# Altium PCB SOM_Codec_WM8731.PcbDoc (part 1 of 2)
Units mm, origin at the board's own origin, x right, y up, seen from the top; angles counter-clockwise.
Board outline 137 x 91.68 mm, 4 copper layers (Top Layer, Mid-Layer 1, Mid-Layer 3, Bottom Layer); 135 components, 119 nets, 648 pads, 240 vias.
Unrouted connection lines stored in the file: 116.
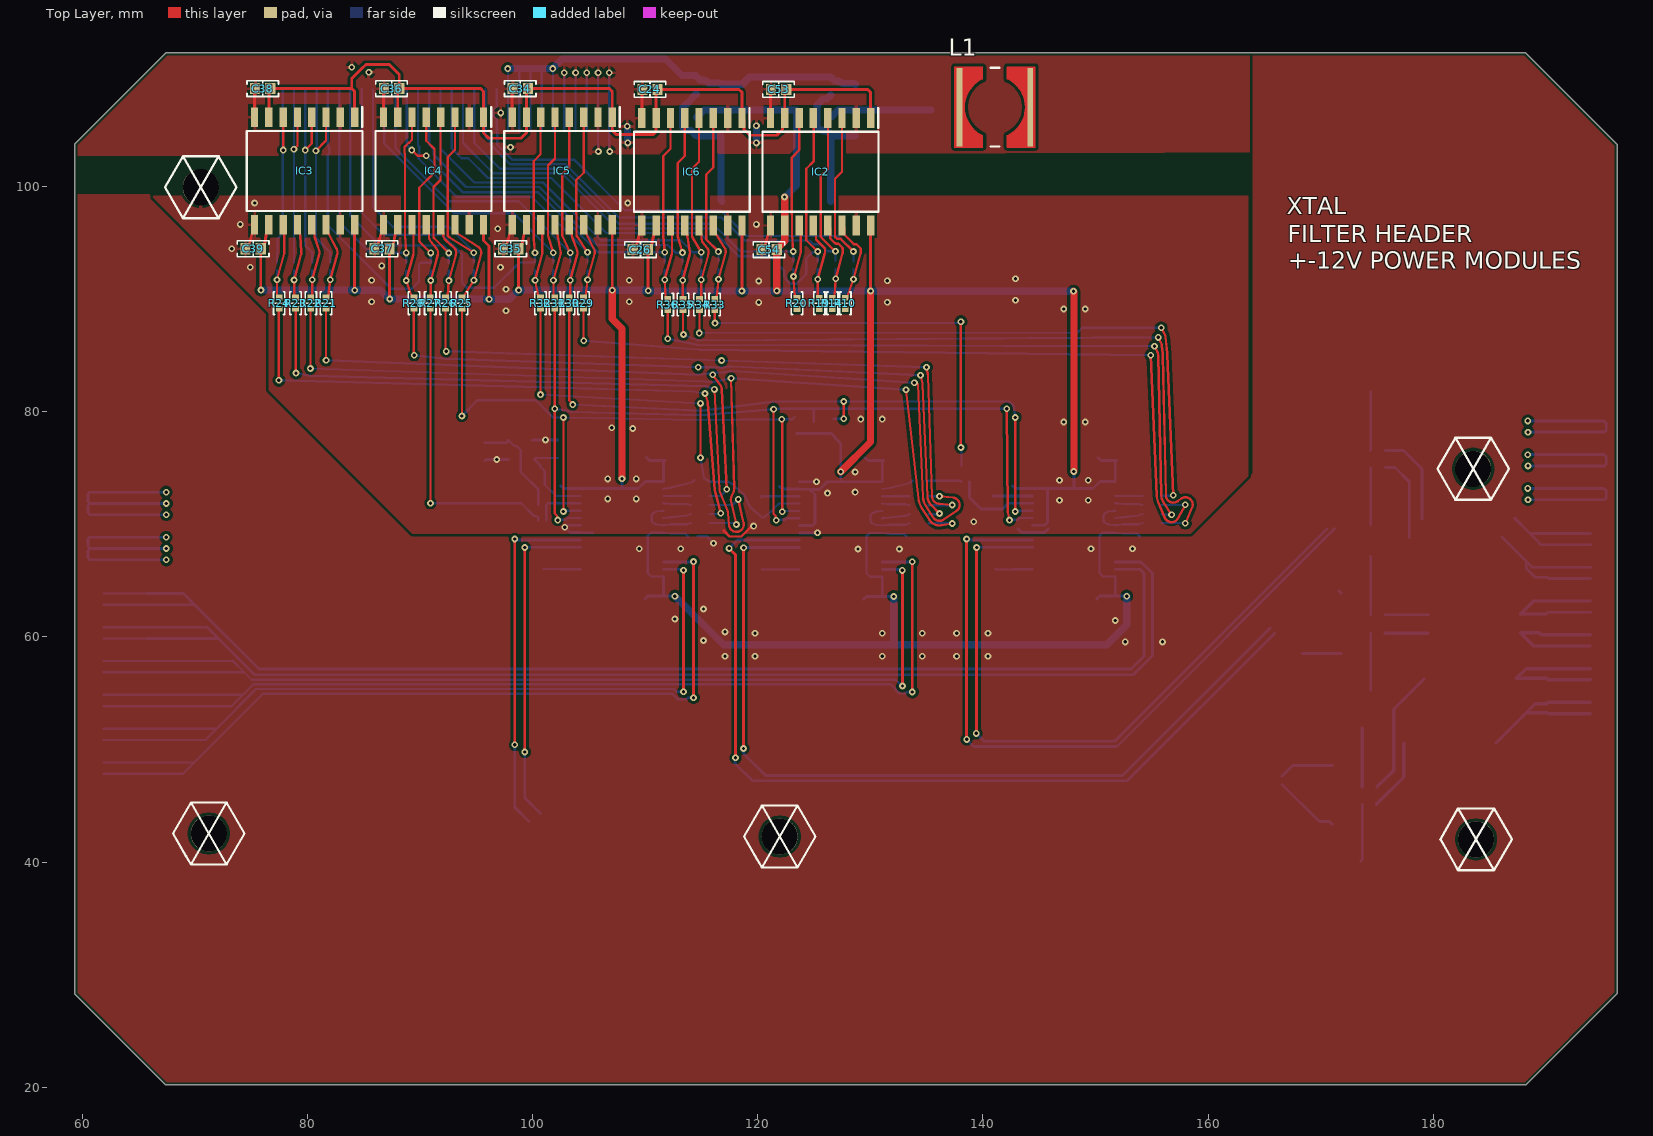
[diagram p0: Top Layer view]
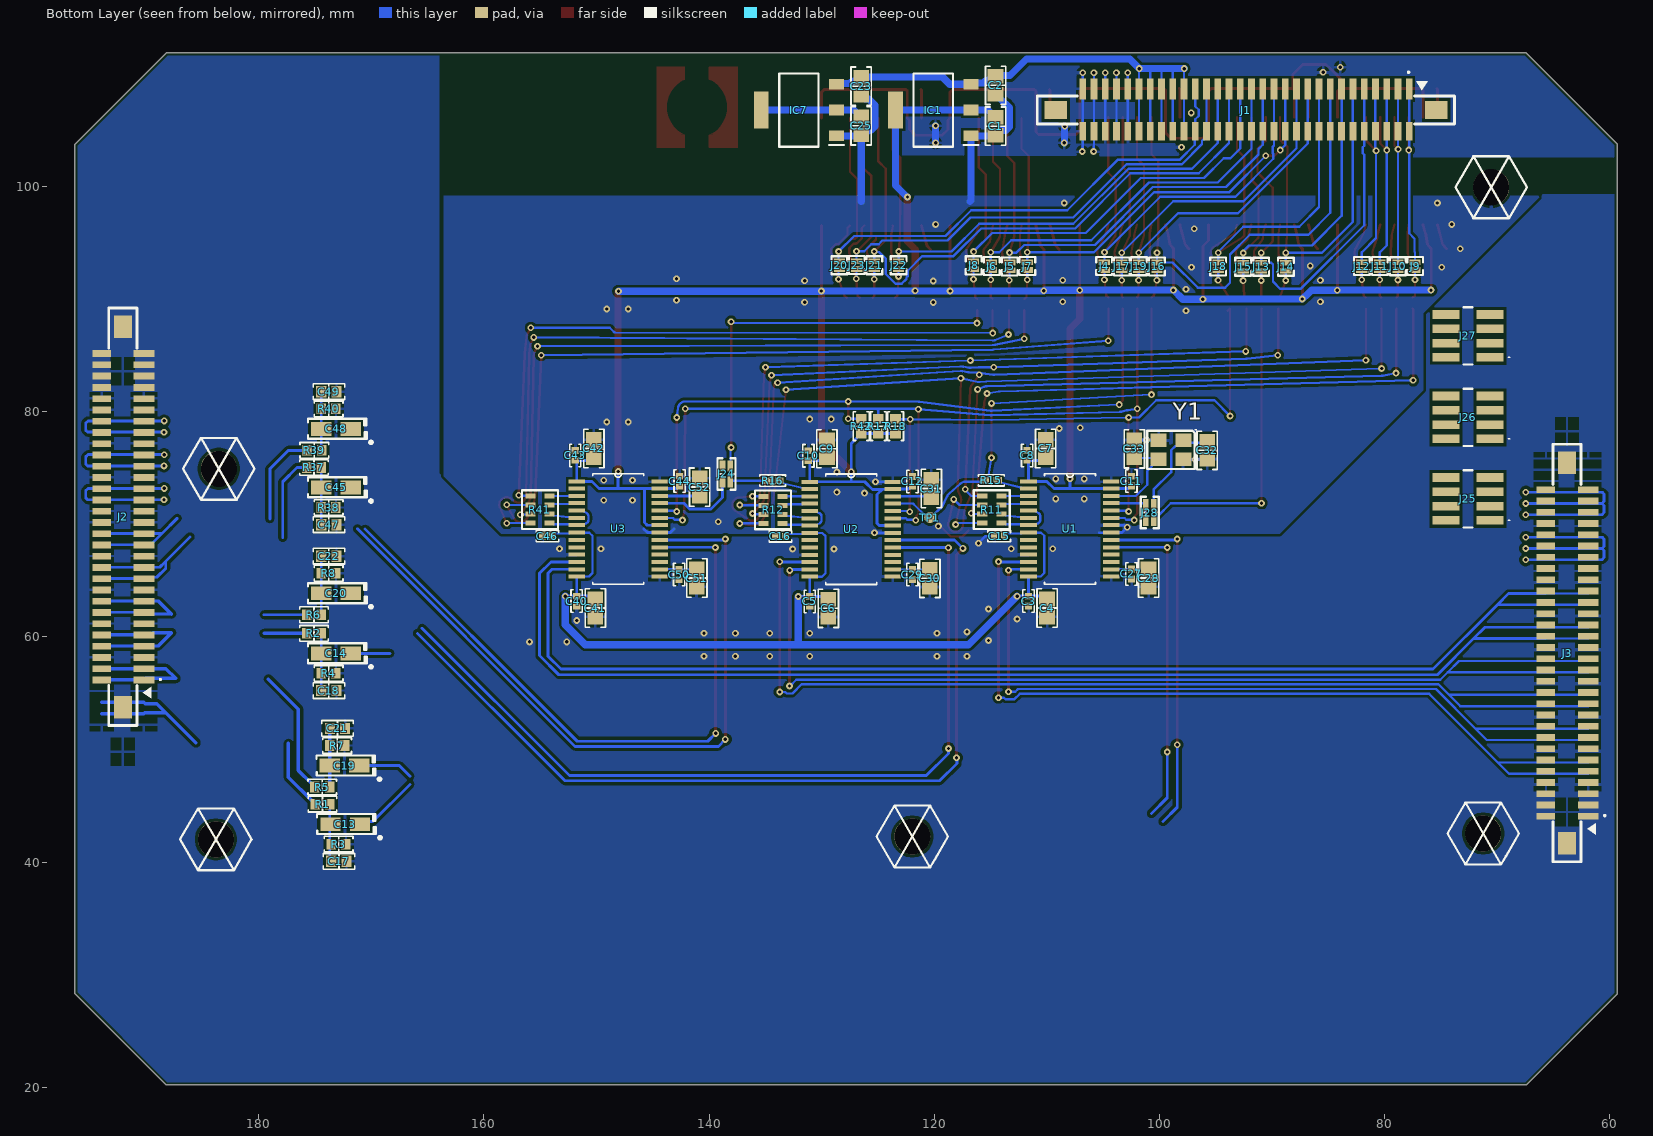
[diagram p1: Bottom Layer view, seen from below]

## Layer stack, top to bottom
Top Solder: solder mask 0.0102, Solder Resist, Dk 3.5
Top Layer: signal copper 0.0356
Dielectric 1: dielectric 0.32, FR-4, Dk 4.8
Mid-Layer 1: signal copper 0.0356
Dielectric2: dielectric 0.32, FR-4, Dk 4.8
Mid-Layer 3: signal copper 0.0356
Dielectric3: dielectric 0.32, FR-4, Dk 4.8
Bottom Layer: signal copper 0.0356
Bottom Solder: solder mask 0.0102, Solder Resist, Dk 3.5

## Board outline
59.346,28.284 67.423,20.207 188.228,20.207 196.342,28.321 196.342,103.505 196.342,103.759 188.214,111.887 67.437,111.887 59.346,103.796

## Design rules (kind name [scope] priority, off if disabled: settings)
BoardOutlineClearance [All] p1: gap=0.254 ignorepadtopadclearanceinfootprint=FALSE except(0: Arc-SplitContinuation Track-SplitContinuation SMDPad-SplitContinuation THPad-SplitContinuation Via-SplitContinuation Fill-SplitContinuation Poly-SplitContinuation Region-SplitContinuation Text-SplitContinuation)
Clearance [All] p1: gap=0.254 ignorepadtopadclearanceinfootprint=TRUE except(0.203: Arc-Arc Arc-Track Arc-SMDPad Track-Track Track-SMDPad)
HoleSize [All] p1: absolutevalues=TRUE maxlimit=4 minlimit=0.025 maxpercent=80.000 minpercent=20.000
MinimumSolderMaskSliver [All] p1: minsoldermaskwidth=0.102
PolygonConnect PolygonConnect_11 [All vs InNet('+5V')] p1: thpad.connectstyle=Relief thpad.reliefconductorwidth=0.254 thpad.reliefentries=4 thpad.polygonreliefangle="90 Angle" thpad.airgapwidth=0.254 smdpad.connectstyle=Relief smdpad.reliefconductorwidth=0.254 smdpad.reliefentries=4 smdpad.polygonreliefangle="90 Angle" smdpad.airgapwidth=0.254 via.connectstyle=Direct via.reliefconductorwidth=0.254 via.reliefentries=4 via.polygonreliefangle="90 Angle" via.airgapwidth=0.254
PolygonConnect PolygonConnect_10 [All vs InNet('+3V3_CODEC')] p2: thpad.connectstyle=Relief thpad.reliefconductorwidth=0.254 thpad.reliefentries=4 thpad.polygonreliefangle="90 Angle" thpad.airgapwidth=0.254 smdpad.connectstyle=Relief smdpad.reliefconductorwidth=0.254 smdpad.reliefentries=4 smdpad.polygonreliefangle="90 Angle" smdpad.airgapwidth=0.254 via.connectstyle=Direct via.reliefconductorwidth=0.254 via.reliefentries=4 via.polygonreliefangle="90 Angle" via.airgapwidth=0.254
PolygonConnect PolygonConnect_9 [All vs InNet('GND_A')] p3: thpad.connectstyle=Relief thpad.reliefconductorwidth=0.254 thpad.reliefentries=4 thpad.polygonreliefangle="90 Angle" thpad.airgapwidth=0.254 smdpad.connectstyle=Relief smdpad.reliefconductorwidth=0.254 smdpad.reliefentries=4 smdpad.polygonreliefangle="90 Angle" smdpad.airgapwidth=0.254 via.connectstyle=Direct via.reliefconductorwidth=0.254 via.reliefentries=4 via.polygonreliefangle="90 Angle" via.airgapwidth=0.254
PolygonConnect PolygonConnect_8 [All vs InNet('GND')] p4: thpad.connectstyle=Relief thpad.reliefconductorwidth=0.254 thpad.reliefentries=4 thpad.polygonreliefangle="90 Angle" thpad.airgapwidth=0.254 smdpad.connectstyle=Relief smdpad.reliefconductorwidth=0.254 smdpad.reliefentries=4 smdpad.polygonreliefangle="90 Angle" smdpad.airgapwidth=0.254 via.connectstyle=Direct via.reliefconductorwidth=0.254 via.reliefentries=4 via.polygonreliefangle="90 Angle" via.airgapwidth=0.254
PolygonConnect PolygonConnect_7 [All vs InNet('+MCU')] p5: thpad.connectstyle=Relief thpad.reliefconductorwidth=0.254 thpad.reliefentries=4 thpad.polygonreliefangle="90 Angle" thpad.airgapwidth=0.254 smdpad.connectstyle=Relief smdpad.reliefconductorwidth=0.254 smdpad.reliefentries=4 smdpad.polygonreliefangle="90 Angle" smdpad.airgapwidth=0.254 via.connectstyle=Direct via.reliefconductorwidth=0.254 via.reliefentries=4 via.polygonreliefangle="90 Angle" via.airgapwidth=0.254
PolygonConnect PolygonConnect_6 [All vs InNet('+5V')] p6: thpad.connectstyle=Relief thpad.reliefconductorwidth=0.254 thpad.reliefentries=4 thpad.polygonreliefangle="90 Angle" thpad.airgapwidth=0.254 smdpad.connectstyle=Relief smdpad.reliefconductorwidth=0.254 smdpad.reliefentries=4 smdpad.polygonreliefangle="90 Angle" smdpad.airgapwidth=0.254 via.connectstyle=Direct via.reliefconductorwidth=0.254 via.reliefentries=4 via.polygonreliefangle="90 Angle" via.airgapwidth=0.254
PolygonConnect PolygonConnect_5 [All vs IsNamedPolygon('+5V_L01_P002')] p7: thpad.connectstyle=Relief thpad.reliefconductorwidth=0.254 thpad.reliefentries=4 thpad.polygonreliefangle="90 Angle" thpad.airgapwidth=0.254 smdpad.connectstyle=Direct smdpad.reliefconductorwidth=0.254 smdpad.reliefentries=4 smdpad.polygonreliefangle="90 Angle" smdpad.airgapwidth=0.254 via.connectstyle=Direct via.reliefconductorwidth=0.254 via.reliefentries=4 via.polygonreliefangle="90 Angle" via.airgapwidth=0.254
PolygonConnect PolygonConnect_4 [All vs IsNamedPolygon('V_USB_L01_P001')] p8: thpad.connectstyle=Relief thpad.reliefconductorwidth=0.254 thpad.reliefentries=4 thpad.polygonreliefangle="90 Angle" thpad.airgapwidth=0.254 smdpad.connectstyle=Direct smdpad.reliefconductorwidth=0.254 smdpad.reliefentries=4 smdpad.polygonreliefangle="90 Angle" smdpad.airgapwidth=0.254 via.connectstyle=Direct via.reliefconductorwidth=0.254 via.reliefentries=4 via.polygonreliefangle="90 Angle" via.airgapwidth=0.254
PolygonConnect PolygonConnect_3 [All vs IsNamedPolygon('+3V3_D')] p9: thpad.connectstyle=Relief thpad.reliefconductorwidth=0.254 thpad.reliefentries=4 thpad.polygonreliefangle="90 Angle" thpad.airgapwidth=0.254 smdpad.connectstyle=Direct smdpad.reliefconductorwidth=0.254 smdpad.reliefentries=4 smdpad.polygonreliefangle="90 Angle" smdpad.airgapwidth=0.254 via.connectstyle=Direct via.reliefconductorwidth=0.254 via.reliefentries=4 via.polygonreliefangle="90 Angle" via.airgapwidth=0.254
PolygonConnect PolygonConnect_2 [All vs IsNamedPolygon('+5V_Out')] p10: thpad.connectstyle=Relief thpad.reliefconductorwidth=0.254 thpad.reliefentries=4 thpad.polygonreliefangle="90 Angle" thpad.airgapwidth=0.254 smdpad.connectstyle=Direct smdpad.reliefconductorwidth=0.254 smdpad.reliefentries=4 smdpad.polygonreliefangle="90 Angle" smdpad.airgapwidth=0.254 via.connectstyle=Direct via.reliefconductorwidth=0.254 via.reliefentries=4 via.polygonreliefangle="90 Angle" via.airgapwidth=0.254
PolygonConnect PolygonConnect_1 [All vs IsNamedPolygon('GND_MCU')] p11: thpad.connectstyle=Relief thpad.reliefconductorwidth=0.254 thpad.reliefentries=4 thpad.polygonreliefangle="90 Angle" thpad.airgapwidth=0.254 smdpad.connectstyle=Direct smdpad.reliefconductorwidth=0.254 smdpad.reliefentries=4 smdpad.polygonreliefangle="90 Angle" smdpad.airgapwidth=0.254 via.connectstyle=Direct via.reliefconductorwidth=0.254 via.reliefentries=4 via.polygonreliefangle="90 Angle" via.airgapwidth=0.254
PolygonConnect [All] p12: connectstyle=Relief reliefconductorwidth=0.254 reliefentries=4 polygonreliefangle="90 Angle" airgapwidth=0.254
RoomDefinition SOM_Codec_WM8731 [InComponentClass('SOM_Codec_WM8731')] p1: confinementstyle=ConfineIn formatcopy=TRUE lockcomponents=FALSE outline 0,0 50.8,0 50.8,25.4 0,25.4
RoutingVias [All] p1: holewidth=0.3 width=0.6 viastyle="Through Hole" minholewidth=0.3 minwidth=0.6 maxholewidth=0.3 maxwidth=0.6
SolderMaskExpansion [All] p1: expansion=0.051 istentingtop=FALSE
Width [All] p1: maxlimit=1.27 minlimit=0.203 preferedwidth=0.203
28 further rules are at their usual default settings.

## Classes and differential pairs
net class PowerNet: NetC25_2

## Components (designator, comment, footprint, x,y, rotation, side; value= is the part's Value field where it differs from the comment)
C1 "=VALUE" "CAP 0805_2012" 114.554,105.372 r90 bottom
C2 "=VALUE" "CAP 0805_2012" 114.554,109.004 r90 bottom
C3 "=VALUE" "CAP 0402_1005" 111.633,63.187 r90 bottom
C4 "=VALUE" "CAP 0805_2012" 109.982,62.573 r90 bottom
C5 "=VALUE" "CAP 0402_1005" 131.064,63.162 r90 bottom
C6 "=VALUE" "CAP 0805_2012" 129.413,62.548 r90 bottom
C7 "=VALUE" "CAP 0805_2012" 110.109,76.746 r270 bottom
C8 "=VALUE" "CAP 0402_1005" 111.76,76.132 r270 bottom
C9 "=VALUE" "CAP 0805_2012" 129.54,76.721 r270 bottom
C10 "=VALUE" "CAP 0402_1005" 131.191,76.107 r270 bottom
C11 "=VALUE" "CAP 0402_1005" 102.489,73.846 r90 bottom
C12 "=VALUE" "CAP 0402_1005" 121.94,73.821 r90 bottom
C13 "10 µF" "CAP POL 1206_3216" 172.332,43.373 r0 bottom
C14 "10 µF" "CAP POL 1206_3216" 173.141,58.547 r0 bottom
C15 "=VALUE" "CAP 0402_1005" 114.232,68.961 r180 bottom
C16 "=VALUE" "CAP 0402_1005" 133.663,68.936 r180 bottom
C17 "=VALUE" "CAP 0603_1608" 172.887,40.071 r0 bottom
C18 "=VALUE" "CAP 0603_1608" 173.776,55.245 r0 bottom
C19 "10 µF" "CAP POL 1206_3216" 172.379,48.58 r0 bottom
C20 "10 µF" "CAP POL 1206_3216" 173.141,63.881 r0 bottom
C21 "=VALUE" "CAP 0603_1608" 173.014,51.882 r0 bottom
C22 "=VALUE" "CAP 0603_1608" 173.776,67.183 r0 bottom
C23 "=VALUE" "CAP 0805_2012" 126.492,108.928 r90 bottom
C24 "=VALUE" "CAP 0603_1608" 110.431,108.641 r0 top
C25 "=VALUE" "CAP 0805_2012" 126.492,105.41 r90 bottom
C26 "=VALUE" "CAP 0603_1608" 109.582,94.417 r0 top
C27 "=VALUE" "CAP 0402_1005" 102.489,65.6 r270 bottom
C28 "=VALUE" "CAP 0805_2012" 100.965,65.24 r270 bottom
C29 "=VALUE" "CAP 0402_1005" 121.945,65.549 r270 bottom
C30 "=VALUE" "CAP 0805_2012" 120.396,65.215 r270 bottom
C31 "=VALUE" "CAP 0805_2012" 120.269,73.19 r90 bottom
C32 "=VALUE" "CAP 0805_2012" 95.758,76.581 r270 bottom
C33 "=VALUE" "CAP 0805_2012" 102.235,76.708 r90 bottom
C34 "=VALUE" "CAP 0603_1608" 98.913,108.712 r0 top
C35 "=VALUE" "CAP 0603_1608" 98.064,94.488 r0 top
C36 "=VALUE" "CAP 0603_1608" 87.483,108.712 r0 top
C37 "=VALUE" "CAP 0603_1608" 86.634,94.488 r0 top
C38 "=VALUE" "CAP 0603_1608" 76.033,108.712 r0 top
C39 "=VALUE" "CAP 0603_1608" 75.184,94.488 r0 top
C40 "=VALUE" "CAP 0402_1005" 151.765,63.187 r90 bottom
C41 "=VALUE" "CAP 0805_2012" 150.114,62.573 r90 bottom
C42 "=VALUE" "CAP 0805_2012" 150.241,76.746 r270 bottom
C43 "=VALUE" "CAP 0402_1005" 151.892,76.132 r270 bottom
C44 "=VALUE" "CAP 0402_1005" 142.621,73.846 r90 bottom
C45 "10 µF" "CAP POL 1206_3216" 173.141,73.279 r0 bottom
C46 "=VALUE" "CAP 0402_1005" 154.364,68.961 r180 bottom
C47 "=VALUE" "CAP 0603_1608" 173.776,69.977 r0 bottom
C48 "10 µF" "CAP POL 1206_3216" 173.141,78.486 r0 bottom
C49 "=VALUE" "CAP 0603_1608" 173.776,81.788 r0 bottom
C50 "=VALUE" "CAP 0402_1005" 142.672,65.549 r270 bottom
C51 "=VALUE" "CAP 0805_2012" 141.097,65.24 r270 bottom
C52 "=VALUE" "CAP 0805_2012" 140.843,73.317 r90 bottom
C53 "=VALUE" "CAP 0603_1608" 121.861,108.641 r0 top
C54 "=VALUE" "CAP 0603_1608" 121.012,94.417 r0 top
IC1 "ams1117-3.3v" SOT-223 120.094,106.807 r0 bottom
IC2 "ISO7241CDWR" SOIC127P1030X265-16N 125.584,101.326 r270 top
IC3 "ISO7241CDWR" SOIC127P1030X265-16N 79.756,101.397 r270 top
IC4 "ISO7241CDWR" SOIC127P1030X265-16N 91.206,101.397 r270 top
IC5 "ISO7241CDWR" SOIC127P1030X265-16N 102.636,101.397 r270 top
IC6 "ISO7241CDWR" SOIC127P1030X265-16N 114.154,101.326 r270 top
IC7 "ams1117-3.3v" SOT-223 132.032,106.807 r0 bottom
J1 "3-1734248-0" 317342480 92.32,107.157 r180 bottom
J2 "3-1734248-0" 317342480 191.735,70.672 r270 bottom
J3 "3-1734248-0" 317342480 63.445,58.575 r270 bottom
J4 "" "CON: JUMPER x1" 104.909,93.297 r270 bottom
J5 "" "CON: JUMPER x1" 113.304,93.267 r270 bottom
J6 "" "CON: JUMPER x1" 114.916,93.297 r270 bottom
J7 "" "CON: JUMPER x1" 111.741,93.297 r270 bottom
J8 "" "CON: JUMPER x1" 116.516,93.359 r270 bottom
J9 "" "CON: JUMPER x1" 77.299,93.297 r270 bottom
J10 "" "CON: JUMPER x1" 78.818,93.283 r270 bottom
J11 "" "CON: JUMPER x1" 80.423,93.297 r270 bottom
J12 "" "CON: JUMPER x1" 82.023,93.297 r270 bottom
J13 "" "CON: JUMPER x1" 90.962,93.245 r270 bottom
J14 "" "CON: JUMPER x1" 88.778,93.245 r270 bottom
J15 "" "CON: JUMPER x1" 92.564,93.235 r270 bottom
J16 "" "CON: JUMPER x1" 100.223,93.264 r270 bottom
J17 "" "CON: JUMPER x1" 103.347,93.264 r270 bottom
J18 "" "CON: JUMPER x1" 94.787,93.264 r270 bottom
J19 "" "CON: JUMPER x1" 101.839,93.281 r270 bottom
J20 "" "CON: JUMPER x1" 128.429,93.362 r270 bottom
J21 "" "CON: JUMPER x1" 125.33,93.362 r270 bottom
J22 "" "CON: JUMPER x1" 123.171,93.362 r270 bottom
J23 "" "CON: JUMPER x1" 126.893,93.391 r270 bottom
J24 "" "CON: JUMPER x2"#1 138.461,73.787 r180 bottom
J25 "20021121-00008T4LF" 2002112100008T4LF 72.599,72.263 r90 bottom
J26 "20021121-00008T4LF" 2002112100008T4LF 72.599,79.502 r90 bottom
J27 "20021121-00008T4LF" 2002112100008T4LF 72.599,86.741 r90 bottom
J28 "" "CON: JUMPER x2"#2 100.869,71.755 r180 bottom
L1 "" "BOURNS SRR6028" 141.072,107.061 r180 top value="3.3 µH"
R1 "5.6 kOhms" "RES 0603_1608" 174.339,45.151 r180 bottom
R2 "5.6 kOhms" "RES 0603_1608" 175.101,60.325 r180 bottom
R3 "5.6 kOhms" "RES 0603_1608" 172.912,41.595 r0 bottom
R4 "5.6 kOhms" "RES 0603_1608" 173.801,56.769 r0 bottom
R5 "5.6 kOhms" "RES 0603_1608" 174.369,46.675 r180 bottom
R6 "5.6 kOhms" "RES 0603_1608" 175.101,61.976 r180 bottom
R7 "5.6 kOhms" "RES 0603_1608" 173.039,50.358 r0 bottom
R8 "5.6 kOhms" "RES 0603_1608" 173.801,65.659 r0 bottom
R10 "22 Ohms" "YAGEO RES 0402_1005" 127.786,89.639 r270 top
R11 "CAY16-33R0F4LF" "RESNET 1206-8 CONVEX" 114.896,71.317 r180 bottom
R12 "CAY16-33R0F4LF" "RESNET 1206-8 CONVEX" 134.327,71.292 r0 bottom
R14 "22 Ohms" "YAGEO RES 0402_1005" 126.631,89.639 r270 top
R15 "100 Ohms" "RES 0402_1005" 114.935,73.914 r0 bottom
R16 "100 Ohms" "RES 0402_1005" 134.366,73.889 r0 bottom
R17 "5.6 kOhms" "RES 0603_1608" 124.968,78.725 r90 bottom
R18 "5.6 kOhms" "RES 0603_1608" 123.444,78.725 r90 bottom
R19 "22 Ohms" "YAGEO RES 0402_1005" 125.476,89.639 r270 top
R20 "22 Ohms" "YAGEO RES 0402_1005" 123.486,89.639 r270 top
R21 "22 Ohms" "YAGEO RES 0402_1005" 81.661,89.654 r270 top
R22 "22 Ohms" "YAGEO RES 0402_1005" 80.306,89.654 r270 top
R23 "22 Ohms" "YAGEO RES 0402_1005" 78.951,89.654 r270 top
R24 "22 Ohms" "YAGEO RES 0402_1005" 77.496,89.654 r270 top
R25 "22 Ohms" "YAGEO RES 0402_1005" 93.726,89.654 r270 top
R26 "22 Ohms" "YAGEO RES 0402_1005" 92.271,89.654 r270 top
R27 "22 Ohms" "YAGEO RES 0402_1005" 90.916,89.654 r270 top
R28 "22 Ohms" "YAGEO RES 0402_1005" 89.461,89.654 r270 top
R29 "22 Ohms" "YAGEO RES 0402_1005" 104.521,89.654 r270 top
R30 "22 Ohms" "YAGEO RES 0402_1005" 103.251,89.654 r270 top
R31 "22 Ohms" "YAGEO RES 0402_1005" 101.981,89.654 r270 top
R32 "22 Ohms" "YAGEO RES 0402_1005" 100.711,89.654 r270 top
R33 "22 Ohms" "YAGEO RES 0402_1005" 116.177,89.525 r270 top
R34 "22 Ohms" "YAGEO RES 0402_1005" 114.822,89.525 r270 top
R35 "22 Ohms" "YAGEO RES 0402_1005" 113.367,89.525 r270 top
R36 "22 Ohms" "YAGEO RES 0402_1005" 112.012,89.525 r270 top
R37 "5.6 kOhms" "RES 0603_1608" 175.101,75.057 r180 bottom
R38 "5.6 kOhms" "RES 0603_1608" 173.801,71.501 r0 bottom
R39 "5.6 kOhms" "RES 0603_1608" 175.071,76.581 r180 bottom
R40 "5.6 kOhms" "RES 0603_1608" 173.801,80.264 r0 bottom
R41 "CAY16-33R0F4LF" "RESNET 1206-8 CONVEX" 155.028,71.317 r0 bottom
R42 "5.6 kOhms" "RES 0603_1608" 126.492,78.725 r90 bottom
TP1 "CLKOUT1" TESTPOINT 120.396,70.612 r270 bottom
U1 "WM8731" TSSOP-28 107.95,69.596 r180 bottom
U2 "WM8731" TSSOP-28 127.381,69.571 r180 bottom
U3 "WM8731" TSSOP-28 148.082,69.596 r180 bottom
Y1 "24.576MHz" "ABRACON ABM8G" 98.976,76.62 r0 bottom

## Footprints (in the part's own frame and the unit in brackets; to place one, negate y for a bottom-side part, rotate by r counter-clockwise, add the part's x,y. Pads: shape width x height; smd on the part's side, far side on the other; paste and mask are expansions set on the pad)
317342480 [mm]
  rect 0.6x1.85 smd: 1(14.5,1.525) 3(13.5,1.525) 5(12.5,1.525) 7(11.5,1.525) 9(10.5,1.525) 11(9.5,1.525) 13(8.5,1.525) 15(7.5,1.525) 17(6.5,1.525) 19(5.5,1.525) 21(4.5,1.525) 23(3.5,1.525) 25(2.5,1.525) 27(1.5,1.525) 29(0.5,1.525) 31(-0.5,1.525) 33(-1.5,1.525) 35(-2.5,1.525) 37(-3.5,1.525) 39(-4.5,1.525) 41(-5.5,1.525) 43(-6.5,1.525) 45(-7.5,1.525) 47(-8.5,1.525) 49(-9.5,1.525) 51(-10.5,1.525) 53(-11.5,1.525) 55(-12.5,1.525) 57(-13.5,1.525) 59(-14.5,1.525)
  rect 0.6x1.65 smd: 2(14.5,-2.225) 4(13.5,-2.225) 6(12.5,-2.225) 8(11.5,-2.225) 10(10.5,-2.225) 12(9.5,-2.225) 14(8.5,-2.225) 16(7.5,-2.225) 18(6.5,-2.225) 20(5.5,-2.225) 22(4.5,-2.225) 24(3.5,-2.225) 26(2.5,-2.225) 28(1.5,-2.225) 30(0.5,-2.225) 32(-0.5,-2.225) 34(-1.5,-2.225) 36(-2.5,-2.225) 38(-3.5,-2.225) 40(-4.5,-2.225) 42(-5.5,-2.225) 44(-6.5,-2.225) 46(-7.5,-2.225) 48(-8.5,-2.225) 50(-9.5,-2.225) 52(-10.5,-2.225) 54(-11.5,-2.225) 56(-12.5,-2.225) 58(-13.5,-2.225) 60(-14.5,-2.225)
  rect 2x1.6 smd paste+0 mask+0.05: 31(-16.9,-0.35) 32(16.9,-0.35)
  silkscreen extent -18.54,-1.6 18.54,3.05, body extent -18.7,-2.68 18.7,2.17, height 5.68
2002112100008T4LF [mm]
  rect 0.76x2.4 smd: 1(-1.905,-1.95) 2(-1.905,1.95) 3(-0.635,-1.95) 4(-0.635,1.95) 5(0.635,-1.95) 6(0.635,1.95) 7(1.905,-1.95) 8(1.905,1.95)
  silkscreen extent -2.54,-3.7 2.54,0.4, body extent -2.53,-2.75 2.55,2.75, height 4.5
"ABRACON ABM8G" [mm] "Crystal, 4-Leads, Body 2.50x3.20mm, Pitch 2.20mm, IPC Medium Density"
  rect 1.4x1.2 smd: 1(-1.1,-0.85) 2(1.1,-0.85) 3(1.1,0.85) 4(-1.1,0.85)
  silkscreen extent -2.25,-1.85 2.1,1.7, body extent -1.61,-1.26 1.61,1.26, height 0.6
"BOURNS SRR6028" [mm] "Precision Wire Wound Inductor, 2-Leads, Body 6.80x6.80mm, IPC Medium Density"
  rect 0.5x7 smd: 1(-3.15,0) 2(3.15,0)
  Top Layer region: 3.6,3.6 1.1,3.6 1.1,2.5 1.4,2.4 1.7,2.1 1.9,2 2.1,1.7 2.3,1.4 2.5,1 2.6,0.7 2.7,0.3 2.7,0 3.6,0
  Top Layer region: 3.6,-3.6 1.1,-3.6 1.1,-2.5 1.4,-2.4 1.7,-2.1 1.9,-2 2.1,-1.7 2.3,-1.4 2.5,-1 2.6,-0.7 2.7,-0.3 2.7,0 3.6,0
  Top Layer region: -3.6,-3.6 -1.1,-3.6 -1.1,-2.5 -1.4,-2.4 -1.7,-2.1 -1.9,-2 -2.1,-1.7 -2.3,-1.4 -2.5,-1 -2.6,-0.7 -2.7,-0.3 -2.7,0 -3.6,0
  Top Layer region: -3.6,3.6 -1.1,3.6 -1.1,2.5 -1.4,2.4 -1.7,2.1 -1.9,2 -2.1,1.7 -2.3,1.4 -2.5,1 -2.6,0.7 -2.7,0.3 -2.7,0 -3.6,0
  Top Layer lines w0.1: 1.1,3.55 1.1,2.5 ; 1.1,2.5 cw(c0,0) 2.731,0 cw(c0,0) 1.1,-2.5 ; 1.1,-2.5 1.1,-3.55 ; -1.1,3.55 -1.1,2.5 ; -1.1,2.5 ccw(c0,0) -2.731,0 ccw(c0,0) -1.1,-2.5 ; -1.1,-2.5 -1.1,-3.55
  silkscreen extent -0.4,-3.5 0.4,3.5, body extent -3.4,-3.4 3.4,3.4, height 2.8
"CAP 0402_1005" [mm] "Chip Capacitor, 2-Leads, Body 1.02x0.51mm, IPC Medium Density"
  rect 0.6x0.64 smd: 1(-0.44,0) 2(0.44,0)
  silkscreen extent -1,-0.5 1,0.5, body extent -0.5,-0.26 0.5,0.26, height 0.52
"CAP 0603_1608" [mm] "Chip Capacitor, 2-Leads, Body 1.60x0.80mm, IPC Medium Density"
  rect 0.9x1 smd: 1(-0.675,0) 2(0.675,0)
  silkscreen extent -1.4,-0.7 1.4,0.7, body extent -0.8,-0.41 0.8,0.41, height 0.82
"CAP 0805_2012" [mm] "Chip Capacitor, 2-Leads, Body 2.00x1.20mm, IPC Medium Density"
  rect 1.3x1.4 smd: 1(-0.8,0) 2(0.8,0)
  silkscreen extent -1.7,-0.9 1.7,0.9, body extent -1,-0.64 1,0.64, height 1.26
"CAP POL 1206_3216" [mm] "Molded Capacitor, 2-Leads, Body 3.20x1.6mm, IPC Medium Density"
  rect 1.8x1.23 smd: 1(-1.31,0) 2(1.31,0)
  silkscreen extent -3.22,-0.9 2.5,1.32, body extent -1.72,-0.85 1.71,0.85, height 1.7
"CON: JUMPER x1" [mm]
  rect 0.5x1 smd: 1(0,0) 2(0.7,0)
  silkscreen extent -0.45,-0.7 1.15,0.7
"CON: JUMPER x2"#1 [mm]
  rect 0.5x1 smd: 1(-0.35,1.4) 2(0.35,1.4) 3(-0.35,0) 4(0.35,0)
  silkscreen extent -0.8,-0.7 0.8,2.1
"CON: JUMPER x2"#2 [mm]
  rect 0.5x1 smd: 1(-0.35,-1.4) 2(0.35,-1.4) 3(-0.35,0) 4(0.35,0)
  silkscreen extent -0.8,-2.1 0.8,0.7
"RES 0402_1005" [mm] "Chip Resistor, 2-Leads, Body 1.0x0.5mm, IPC Medium Density"
  rect 0.75x0.6 smd: 1(-0.575,0) 2(0.575,0)
  silkscreen extent -1.14,-0.51 1.14,0.51, body extent -0.5,-0.25 0.5,0.25, height 0.35
"RES 0603_1608" [mm] "Chip Resistor, 2-Leads, Body 1.60x0.80mm, IPC Medium Density"
  rect 0.85x0.95 smd: 1(-0.65,0) 2(0.65,0)
  silkscreen extent -1.27,-0.7 1.27,0.7, body extent -0.8,-0.4 0.8,0.4, height 0.45
"RESNET 1206-8 CONVEX" [mm] "4 resistor 3.20x1.60mm, 0.7mm high"
  rect 0.9x0.45 smd: 1(-0.85,1.2) 2(-0.85,0.4) 3(-0.85,-0.4) 4(-0.85,-1.2) 5(0.85,-1.2) 6(0.85,-0.4) 7(0.85,0.4) 8(0.85,1.2)
  silkscreen extent -1.6,-1.73 1.6,1.73, body extent -0.84,-1.63 0.84,1.63, height 0.71
SOIC127P1030X265-16N [mm]
  rect 1.75x0.65 smd: 1(-4.775,4.445) 2(-4.775,3.175) 3(-4.775,1.905) 4(-4.775,0.635) 5(-4.775,-0.635) 6(-4.775,-1.905) 7(-4.775,-3.175) 8(-4.775,-4.445) 9(4.775,-4.445) 10(4.775,-3.175) 11(4.775,-1.905) 12(4.775,-0.635) 13(4.775,0.635) 14(4.775,1.905) 15(4.775,3.175) 16(4.775,4.445)
  silkscreen extent -5.65,-5.15 3.55,5.15, body extent -5.15,-5.15 5.15,5.15, height 2.65
SOT-223 [mm]
  rect 1.3x0.95 smd: 1(-3.35,2.29) 2(-3.35,0) 3(-3.35,-2.29)
  rect 1.3x3.25 smd: 4(3.35,0)
  silkscreen extent -4,-3.25 1.75,3.25, body extent -3.5,-3.25 3.5,3.25, height 1.8
TESTPOINT [mm]
  round 1 / inner round 0 / far side round 0 all layers, no hole mask+0.05: 1(0,0)
TSSOP-28 [mil]
  rect 58x14 smd mask+2.36: 1(-145,166) 2(-145,141) 3(-145,115) 4(-145,90) 5(-145,64) 6(-145,38) 7(-145,13) 8(-145,-13) 9(-145,-38) 10(-145,-64) 11(-145,-90) 12(-145,-115) 13(-145,-141) 14(-145,-166) 15(145,-166) 16(145,-141) 17(145,-115) 18(145,-90) 19(145,-64) 20(145,-38) 21(145,-13) 22(145,13) 23(145,38) 24(145,64) 25(145,90) 26(145,115) 27(145,141) 28(145,166)
  silkscreen extent -89,-193 89,193, body extent -127,-177 127,177, height 44
"YAGEO RES 0402_1005" [mm] "Chip Resistor, 2-Leads, Body 1.0x0.5mm"
  rect 0.5x0.6 smd: 1(-0.5,0) 2(0.5,0)
  silkscreen extent -1,-0.51 1,0.51, body extent -0.5,-0.25 0.5,0.25, height 0.35

## Part data
C1 C4 C6 C7 C9 C25 C28 C30 C41 C42 C51: library part LMK212ABJ106KD-T, "CAP CER 10UF 10V X5R 0805", Capacitance="10 µF", Part Number=LMK212ABJ106KD-T
C2 C23: library part EMK212B7105KGHTR, "CAP CER 1UF 16V X7R 0805", Capacitance="1 µF", Part Number=EMK212B7105KGHTR
C3 C5 C8 C10 C11 C12 C15 C16 C27 C29 C40 C43 C44 C46 C50: library part CL05B104JO5NNNC, "CAP CER 0.1UF 16V X7R 0402", Capacitance="0.1 µF", Part Number=CL05B104JO5NNNC
C13 C14 C19 C20 C45 C48: library part TR3A106K010C2000, "CAP TANT 10UF 10% 10V 1206", Part Number=TR3A106K010C2000
C17 C18 C21 C22 C47 C49: library part CC0603JRX7R9BB221, "CAP CER 220PF 50V X7R 0603", Capacitance="220 pF", Part Number=CC0603JRX7R9BB221
C24 C26 C34 C35 C36 C37 C38 C39 C53 C54: library part 06035C104MAT2A, "CAP CER 0.1UF 50V X7R 0603", Capacitance=0.1µF, Part Number=06035C104MAT2A
C31 C32 C33 C52: library part CBR08C909BAGAC, "CAP CER 9PF 250V C0G/NP0 0805", Capacitance="9 pF", Part Number=CBR08C909BAGAC
IC1 IC7: "Integrated Circuit", Manufacturer_Name="Advanced Monolithic Systems", Supplier Part Number 1=C6186, Datasheet Link=http://www.advanced-monolithic.com/pdf/ds1117.pdf, Height=1.8mm, Manufacturer_Part_Number=ams1117-3.3v, Supplier 1=LCSC
IC2 IC3 IC4 IC5 IC6: "Integrated Circuit", Manufacturer_Name="Texas Instruments", Mouser Part Number=595-ISO7241CDWR, Arrow Part Number=ISO7241CDWR, Arrow Price/Stock=https://www.arrow.com/en/products/iso7241cdwr/texas-instruments?region=nac, Datasheet Link=http://www.ti.com/lit/gpn/iso7241c, Height=2.65mm, Manufacturer_Part_Number=ISO7241CDWR, Mouser Price/Stock=https://www.mouser.co.uk/ProductDetail/Texas-Instruments/ISO7241CDWR?qs=LDGDZb5k%2F%252B%2FseN2cNP%252BcHQ%3D%3D
J1 J2 J3: "Connector", Manufacturer_Name="TE Connectivity", Mouser Part Number=571-3-1734248-0, Arrow Part Number=3-1734248-0, Arrow Price/Stock=https://www.arrow.com/en/products/3-1734248-0/te-connectivity, Datasheet Link=https://www.te.com/commerce/DocumentDelivery/DDEController?Action=srchrtrv&DocNm=5-1773461-0_Standard_FPC_Connectors_QRG&DocType=Data%20Sheet&DocLang=English&PartCntxt=3-1734248-0&DocFormat=pdf, Height=7.7mm, Manufacturer_Part_Number=3-1734248-0, Mouser Price/Stock=https://www.mouser.co.uk/ProductDetail/TE-Connectivity/3-1734248-0?qs=rVE9j%252BL6g1a4TQRjUuGYiA%3D%3D, System=Connector
J4 J5 J6 J7 J8 J9 J10 J11 J12 J13 J14 J15 J16 J17 J18 J19 J20 J21 J22 J23: library part Jumper_single, CommentText="\"Перемычка\""
J24 J28: library part Jumper_double, CommentText="\"Перемычка\""
J25 J26 J27: "Connector", Manufacturer_Name="Amphenol Communications Solutions", Datasheet Link=https://cdn.amphenol-cs.com/media/wysiwyg/files/drawing/20021121.pdf, Height=4.55mm, Manufacturer_Part_Number=20021121-00008T4LF, System=Connector
L1: library part SRR6028-3R3Y, "FIXED IND 3.3UH 2.5A 28 MOHM SMD", Current - Saturation=2.6A, Current Rating (Amps)="2.5 A", DC Resistance (DCR)="28mOhm Max", Device Package=Nonstandard, Frequency - Self Resonant=45MHz, Inductance="3.3 µH", Inductance Frequency - Test="100 kHz", Manufacturer="Bourns Inc.", Operating Temperature="-40°C ~ 125°C", Q @ Freq="10 @ 7.96MHz", Supplier Part Number 1=118-SRR6028-3R3YCT-ND, Tolerance=±30%, ComponentLink1Description=Datasheet, ComponentLink1URL=https://www.bourns.com/docs/Product-Datasheets/SRR6028.pdf, ComponentLink2Description="DigiKey Link", ComponentLink2URL=https://www.digikey.com/en/products/detail/bourns-inc/SRR6028-3R3Y/1970369, Height - Seated (Max)="0.118\" (3.00mm)", LastUpdated="2/8/2024 9:34:55 PM", Lifecycle Status=Active, Material - Core=Ferrite, Minimum Order=1, Mounting Type="Surface Mount", Package / Case=Nonstandard, Packaging=TapeAndReel, Part Number=SRR6028-3R3Y, Part Status=Active, PartId=57, Price=0.31, Series=SRR6028, Shielding=Shielded, Size / Dimension="0.268\" L x 0.268\" W (6.80mm x 6.80mm)", Supplier 1=DigiKey, Type="Drum Core, Wirewound"
R1 R2 R3 R4 R5 R6 R7 R8 R17 R18 R37 R38 R39 R40 R42: library part RG1608P-562-D-T5, "RES SMD 5.6K OHM 0.5% 1/10W 0603", Part Number=RG1608P-562-D-T5
R10 R14 R19 R20 R21 R22 R23 R24 R25 R26 R27 R28 R29 R30 R31 R32 R33 R34 R35 R36: library part RC0402JR-0722RL, "RES 22 OHM 5% 1/16W 0402", Part Number=RC0402JR-0722RL
R11 R12 R41: "RES ARRAY 4 RES 33 OHM 1206", Part Number=CAY16-33R0F4LF
R15 R16: library part RCA0402100RFKED, "RES SMD 100 OHM 1% 1/16W 0402", Part Number=RCA0402100RFKED
TP1: library part TestPoint
U1 U2 U3: "Stero in/ot audio codec"
Y1: library part ABM8G-24.576MHZ-4Y-T3, "CRYSTAL 24.5760MHZ 10PF SMD", Device Package="4-SMD, No Lead", ESR (Equivalent Series Resistance)="60 Ohms", Frequency Stability=±30ppm, Load Capacitance=10pF, Manufacturer="Abracon LLC", Operating Mode=Fundamental, Operating Temperature="-10°C ~ 60°C", Supplier Part Number 1=535-10914-1-ND, ComponentLink1Description=Datasheet, ComponentLink1URL=https://abracon.com/Resonators/ABM8G.pdf, ComponentLink2Description="DigiKey Link", ComponentLink2URL=http://digikey.com/product-detail/en/abracon-llc/ABM8G-24.576MHZ-4Y-T3/535-10914-1-ND/2624247, Frequency=24.576MHz, Frequency Tolerance=±30ppm, Height - Seated (Max)="0.039\" (1.00mm)", LastUpdated="3/19/2020 10:36:25 PM", Lifecycle Status=Active, Minimum Order=1, Mounting Type="Surface Mount", Package / Case="4-SMD, No Lead", Packaging=TapeAndReel, Part Number=ABM8G-24.576MHZ-4Y-T3, Part Status=Active, PartId=366, Price=0.39, Series=ABM8G, Size / Dimension="0.126\" L x 0.098\" W (3.20mm x 2.50mm)", Supplier 1=DigiKey, Type="MHz Crystal"

## Free pads (board coordinates)
  round 3.2 hole 3.2 unplated: 0(70.531,99.949) 0(71.247,42.545) 0(121.949,42.279) 0(183.555,74.937) 0(183.811,42.021)

## Via types
v1: diameter 0.6, hole 0.3, Top Layer to Bottom Layer, tented both sides, 238 vias
v2: diameter 0.6, hole 0.3, Top Layer to Bottom Layer, 2 vias

## Nets (pads, with @x,y where several pads share a name; then routed paths per layer and width w, separated by ;. In a path a pad name is that pad's centre, name@x,y a point inside that pad or via, vN(x,y) a via of type N, cw(c..) or ccw(c..) an arc to the next point about the centre after c; other vN are vias at no path point)
+3V3_CODEC: C3.2 C4.2 C5.2 C6.2 C15.2 C16.2 C40.2 C41.2 C46.2 L1.1 U1.8 U1.14 U2.8 U2.14 U3.8 U3.14 | length 88.9
  Bottom Layer w0.203: U1.14@111.633,65.38 110.541,65.38 110.236,65.684 110.236,68.986 110.515,69.266 U1.8@111.633,69.266 112.268,69.19 113.594,69.179 C15.2@113.792,68.961 ; U2.14@131.064,65.354 129.972,65.354 129.667,65.659 129.667,68.961 129.946,69.24 U2.8@131.064,69.24 131.699,69.164 133.025,69.154 C16.2@133.223,68.936 ; U3.14@151.765,65.38 150.673,65.38 150.368,65.684 150.368,68.986 150.647,69.266 U3.8@151.765,69.266 152.4,69.19 153.726,69.179 C46.2@153.924,68.961
  Bottom Layer w0.254: C4.2@109.982,63.373 110.236,63.627 C3.2@111.633,63.627 ; U1.14@111.633,65.38 C3.2@111.633,63.627 ; v1(112.649,63.627) C3.2@111.633,63.627 ; C6.2@129.413,63.348 129.667,63.602 C5.2@131.064,63.602 ; U2.14@131.064,65.354 C5.2@131.064,63.602 ; v1(132.08,63.602) C5.2@131.064,63.602 ; C41.2@150.114,63.373 150.368,63.627 C40.2@151.765,63.627 ; U3.14@151.765,65.38 C40.2@151.765,63.627 ; v1(152.781,63.627) C40.2@151.765,63.627
  Bottom Layer w0.635: v1(112.649,63.627) 116.967,59.309 132.08,59.309 ; v1(132.08,63.602) 132.08,59.309 ; v1(152.781,63.627) 152.781,61.087 151.003,59.309 132.08,59.309
+3V3_D: C1.2 C7.2 C8.2 C9.2 C10.2 C11.1 C12.1 C26.2 C35.2 C37.2 C39.2 C42.2 C43.2 C44.1 C54.2 IC1.2 IC1.4 IC2.10 IC2.16 IC3.10 IC3.16 IC4.10 IC4.16 IC5.10 IC5.16 IC6.10 IC6.16 R17.1 R18.1 R42.1 U1.1 U1.27 U2.1 U2.22 U2.27 U3.1 U3.22 U3.27 | length 262.8
  Top Layer w0.254: v1(75.88,90.816) 75.859,90.837 C39.2@75.859,94.488 76.182,94.861 76.383,95.874 IC3.10@76.581,96.622 ; v1(84.201,90.805) IC3.16@84.201,96.622 ; v1(87.32,90.022) 87.309,90.033 C37.2@87.309,94.488 87.632,94.861 87.833,95.874 IC4.10@88.031,96.622 ; IC4.16@95.651,96.622 95.651,95.23 96.142,94.739 v1(96.142,89.997) ; v1@98.739,90.837 C35.2@98.739,94.488 99.062,94.861 99.263,95.874 IC5.10@99.461,96.622 ; v1(107.081,90.805) IC5.16@107.081,96.622 ; v1@110.257,90.766 C26.2@110.257,94.417 110.58,94.79 110.781,95.803 IC6.10@110.979,96.551 ; v1(118.599,90.734) IC6.16@118.599,96.551 ; C54.2@121.687,94.417 C54.2@121.848,94.604 ; v1(130.029,90.734) IC2.16@130.029,96.551
  Top Layer w0.635: v1(107.081,90.805) 107.081,88.245 107.95,87.376 v1(107.95,74.066) ; C54.2@121.687,94.417 121.687,90.766 v1(121.708,90.745) ; C54.2@121.848,94.604 122.409,95.164 IC2.10@122.409,96.551 ; v1(122.38,99.087) 122.406,99.062 IC2.10@122.406,96.554 ; v1(127.381,74.676) 130.029,77.324 v1(130.029,90.734) ; v1(148.055,90.714) 148.082,90.687 v1(148.082,74.701)
  Bottom Layer w0.254: C11.1@102.489,73.406 102.509,73.406 102.738,73.177 U1.27@104.267,73.177 109.372,73.177 110.007,73.812 U1.1@111.633,73.812 111.633,75.565 C8.2@111.76,75.692 110.363,75.692 C7.2@110.109,75.946 ; 107.95,73.177 v1(107.95,74.066) ; C12.1@121.94,73.381 122.113,73.208 122.226,73.208 122.282,73.152 U2.27@123.698,73.152 123.721,73.129 124.627,73.129 ; R18.1@123.444,78.075 R17.1@124.968,78.075 R42.1@126.492,78.075 126.542,78.075 126.84,77.777 126.84,77.727 127.381,77.186 v1(127.381,74.676) 127.381,73.787 ; U2.22@123.698,69.901 124.892,69.901 125.095,70.104 125.095,72.661 124.627,73.129 ; C9.2@129.54,75.921 129.794,75.667 C10.2@131.191,75.667 131.064,75.54 U2.1@131.064,73.787 127.381,73.787 ; C44.1@142.621,73.406 142.641,73.406 142.87,73.177 U3.27@144.399,73.177 ; U3.22@144.399,69.926 145.491,69.926 145.75,70.185 145.75,73.045 145.601,73.194 ; U3.27@144.416,73.194 145.601,73.194 ; v1(148.082,74.701) 148.082,73.194 ; C42.2@150.241,75.946 150.495,75.692 C43.2@151.892,75.692 151.765,75.565 U3.1@151.765,73.812 150.393,73.812 149.775,73.194 148.082,73.194 ; 124.627,73.129 124.917,73.129 124.94,73.106 125.504,73.106 126.185,73.787 127.381,73.787 ; 145.601,73.194 148.082,73.194
  Bottom Layer w0.635: v1(75.88,90.816) 84.19,90.816 v1(84.201,90.805) 86.496,90.805 87.001,90.3 87.042,90.3 v1(87.32,90.022) 96.117,90.022 v1(96.142,89.997) 97.94,89.997 v1(98.76,90.816) 107.07,90.816 v1(107.081,90.805) 110.218,90.805 v1(110.278,90.745) 118.588,90.745 v1(118.599,90.734) 121.696,90.734 v1(121.708,90.745) 130.018,90.745 v1(130.029,90.734) ; C1.2@114.554,106.172 114.604,106.172 115.239,106.807 IC1.2@116.744,106.807 IC1.4@123.444,106.807 123.444,100.098 122.433,99.087 v1(122.38,99.087) ; v1@130.049,90.714 v1(148.055,90.714)
+5V_Out: C2.2 C23.2 IC1.3 IC7.3 J1.41 J1.42 J1.43 J1.44 J1.45 J1.46 J1.47 J1.48 J1.49 J1.50 | length 60.4
  Bottom Layer w0.203: v1(97.79,110.49) 97.82,110.46 J1.41@97.82,108.682 97.82,106.834 97.83,106.825 97.83,106.281 97.82,106.272 J1.42@97.82,104.932 ; J1.44@98.82,104.932 J1.43@98.82,108.682 98.82,110.46 ; J1.46@99.82,104.932 J1.45@99.82,108.682 99.82,110.46 ; J1.48@100.82,104.932 J1.47@100.82,108.682 100.82,110.46 ; J1.50@101.82,104.932 J1.49@101.82,108.682 v1@101.82,110.46
  Bottom Layer w0.635: v1(97.79,110.49) v1(101.79,110.49) 102.632,111.332 111.807,111.332 113.273,109.866 114.492,109.866 C2.2@114.554,109.804 114.887,109.471 115.212,109.471 115.308,109.375 115.47,109.375 115.645,109.2 116.641,109.2 IC1.3@116.744,109.097 118.622,109.097 119.253,109.728 C23.2@126.492,109.728 126.825,109.395 127.15,109.395 127.246,109.299 127.408,109.299 127.545,109.162 128.617,109.162 IC7.3@128.682,109.097
+12: J2.41 J2.42 J2.43 J2.44 J3.41 J3.42 J3.43 J3.44 J3.45 J3.46 | length 38.6
  Bottom Layer w0.254: v1(67.454,68.86) 65.67,68.86 61.92,68.86 60.675,68.86 60.503,68.688 60.503,68.053 60.696,67.86 61.92,67.86 ; v1(67.47,66.86) 65.67,66.86 61.92,66.86 60.696,66.86 60.503,67.053 60.503,67.688 60.675,67.86 61.92,67.86 ; v1(67.47,67.86) 65.67,67.86 61.92,67.86 ; v1(188.41,73.197) 190.21,73.197 193.96,73.197 195.184,73.197 195.377,73.004 195.377,72.369 195.205,72.197 193.96,72.197 190.21,72.197 v1(188.426,72.197)
+48: J2.53 J2.54 J2.55 J2.56 | length 14.7
  Bottom Layer w0.254: v1(188.41,79.197) 190.21,79.197 193.96,79.197 195.184,79.197 195.377,79.004 195.377,78.369 195.205,78.197 193.96,78.197 190.21,78.197 v1(188.426,78.197)
+MCU: C24.2 C34.2 C36.2 C38.2 C53.2 IC2.1 IC2.7 IC3.1 IC3.7 IC4.1 IC4.7 IC5.1 IC5.7 IC6.1 IC6.7 | length 89.2
  Top Layer w0.254: IC3.7@76.581,106.172 76.581,108.585 C38.2@76.708,108.712 83.947,108.712 ; IC3.1@84.201,106.172 84.201,108.458 83.947,108.712 ; IC4.7@88.031,106.172 88.031,108.585 C36.2@88.158,108.712 ; IC2.1@130.029,106.101 130.029,108.387 129.775,108.641 C53.2@122.536,108.641 122.409,108.514 IC2.7@122.409,106.101 122.211,105.903 122.211,105.083 121.699,104.571 119.312,104.571 118.797,105.086 118.797,105.903 IC6.1@118.599,106.101 118.599,108.387 118.345,108.641 C24.2@111.106,108.641 110.979,108.514 IC6.7@110.979,106.101 110.979,104.883 110.744,104.648 107.442,104.648 107.081,105.009 IC5.1@107.081,106.172 107.081,108.458 106.827,108.712 C34.2@99.588,108.712 99.461,108.585 IC5.7@99.461,106.172 99.461,104.795 98.964,104.298 96.108,104.298 95.651,104.755 IC4.1@95.651,106.172 95.651,108.458 95.397,108.712 C36.2@88.158,108.712 ; 83.947,108.712 83.947,109.601 84.785,110.439 84.785,110.44 85.198,110.853 87.267,110.853 88.158,109.962 C36.2@88.158,108.712
-12: J2.47 J2.48 J2.49 J2.50 J3.49 J3.50 J3.51 J3.52 J3.53 J3.54 | length 38.6
  Bottom Layer w0.254: v1(67.454,72.86) 65.67,72.86 61.92,72.86 60.675,72.86 60.503,72.688 60.503,72.053 60.696,71.86 61.92,71.86 ; v1(67.47,70.86) 65.67,70.86 61.92,70.86 60.696,70.86 60.503,71.053 60.503,71.688 60.675,71.86 61.92,71.86 ; v1(67.47,71.86) 65.67,71.86 61.92,71.86 ; v1(188.41,76.197) 190.21,76.197 193.96,76.197 195.184,76.197 195.377,76.004 195.377,75.369 195.205,75.197 193.96,75.197 190.21,75.197 v1(188.426,75.197)
GND: C1.1 C2.1 C7.1 C8.1 C9.1 C10.1 C11.2 C12.2 C23.1 C25.1 C26.1 C31.2 C32.2 C33.2 C35.1 C37.1 C39.1 C42.1 C43.1 C44.2 C52.2 C54.1 IC1.1 IC2.9 IC2.15 IC3.9 IC3.15 IC4.9 IC4.15 IC5.9 IC5.15 IC6.9 IC6.15 IC7.1 pad.0@70.531,99.949 U1.21 U1.22 U1.28 U2.21 U2.28 U3.21 U3.28 Y1.2 Y1.4 | length 55.8
  Top Layer w0.203: 116.967,69.469 117.505,68.931 118.55,68.931 119.327,69.708 119.385,69.708 119.527,69.85 v1(119.634,69.85)
  Top Layer w0.254: C39.1@74.509,94.488 74.832,94.861 75.113,95.874 IC3.9@75.311,96.622 ; C37.1@85.959,94.488 86.282,94.861 86.563,95.874 IC4.9@86.761,96.622 ; C35.1@97.389,94.488 97.712,94.861 97.993,95.874 IC5.9@98.191,96.622 ; C26.1@108.907,94.417 109.23,94.79 109.511,95.803 IC6.9@109.709,96.551 ; C54.1@120.337,94.417 120.66,94.79 120.941,95.803 IC2.9@121.139,96.551
  Bottom Layer w0.254: C32.2@95.758,75.654 95.874,75.77 v2(96.823,75.77) Y1.4@97.876,75.77 ; Y1.2@99.99,77.47 100.024,77.504 v2(101.151,77.504) 102.231,77.504 C33.2@102.235,77.508 ; U1.22@104.267,69.926 103.141,69.926 102.964,69.748 v1(102.87,69.748) 103.337,69.281 104.252,69.281 U1.21@104.267,69.266 105.334,69.266 ; U2.21@123.698,69.24 125.301,69.24 v1(125.312,69.252) ; U2.28@123.698,73.787 v1(125.222,73.787) ; 143.129,69.596 143.456,69.269 144.396,69.269 U3.21@144.399,69.266 144.402,69.269 145.48,69.269 145.814,69.603
  Bottom Layer w0.635: C2.1@114.554,108.204 114.504,108.204 114.171,107.871 114.171,107.821 113.693,107.343 113.638,107.343 113.333,107.038 113.333,105.306 113.638,105.001 114.075,105.001 114.504,104.572 C1.1@114.554,104.572 114.609,104.517 IC1.1@116.744,104.517 116.744,98.775 116.84,98.679 ; 126.492,98.679 C25.1@126.492,104.61 ; C23.1@126.492,108.128 126.159,107.796 125.83,107.796 125.271,107.237 125.271,105.344 125.576,105.039 125.738,105.039 125.834,104.943 126.159,104.943 C25.1@126.492,104.61 ; IC7.1@128.682,104.517 126.585,104.517 C25.1@126.492,104.61
  other v1: 139.192,70.231 146.812,72.144 149.352,72.144 106.68,72.263 109.22,72.263 126.196,72.779 128.651,72.873 146.812,73.922 149.352,73.922 106.68,74.041 109.22,74.041 128.651,74.651 108.912,78.525 107.026,78.597 147.193,79.101 149.098,79.101 129.159,79.355 131.064,79.355 97.646,88.981 147.193,89.134 149.098,89.134 120.103,89.718 131.522,89.729 85.705,89.789 108.585,89.789 142.895,89.916 97.646,90.886 120.103,91.623 131.522,91.634 85.705,91.694 108.585,91.694 142.895,91.821 74.93,92.837 97.155,92.837 86.614,92.964 73.279,94.488 96.901,96.266 74.041,96.647 119.888,96.647 75.311,98.552 108.458,98.552
GND_A: C3.1 C4.1 C5.1 C6.1 C15.1 C16.1 C17.1 C18.1 C21.1 C22.1 C27.2 C28.2 C29.2 C30.2 C40.1 C41.1 C46.1 C47.1 C49.1 C50.2 C51.2 J2.1 J2.2 J2.7 J2.8 J2.13 J2.14 J2.19 J2.20 J2.25 J2.26 J2.31 J2.32 J2.37 J2.38 J2.39 J2.40 J2.45 J2.46 J2.51 J2.52 J2.57 J2.58 J2.59 J2.60 J3.1 J3.2 J3.7 J3.8 J3.13 J3.14 J3.19 J3.20 J3.25 J3.26 J3.31 J3.32 J3.37 J3.38 J3.39 J3.40 J3.47 J3.48 J3.55 J3.56 J3.57 J3.58 J3.59 J3.60 R3.1 R4.1 R7.1 R8.1 R38.1 R40.1 U1.11 U1.15 U2.11 U2.15 U3.11 U3.15 | length 1.7
  Bottom Layer w0.203: C15.1@114.672,68.961 115.443,68.961 v1(116.078,68.326)
  other v1: 117.094,58.293 119.761,58.293 131.064,58.293 134.62,58.293 137.668,58.293 140.462,58.293 152.654,59.563 155.956,59.563 115.189,59.69 119.761,60.325 131.064,60.325 134.62,60.325 137.668,60.325 140.462,60.325 117.094,60.452 151.765,61.468 112.649,61.595 115.189,62.484 128.905,67.818 132.588,67.818 109.474,67.843 113.157,67.843 149.606,67.843 153.289,67.843
GND_MCU: C24.1 C34.1 C36.1 C38.1 C53.1 IC2.2 IC2.8 IC3.2 IC3.8 IC4.2 IC4.8 IC5.2 IC5.8 IC6.2 IC6.8 J1.51 J1.52 J1.53 J1.54 J1.55 J1.56 J1.57 J1.58 J1.59 J1.60 | length 45.8
  Top Layer w0.203: v1(85.466,110.158) 85.466,110.114 85.471,110.109 v1@85.471,109.982
  Top Layer w0.254: IC3.8@75.311,106.172 75.311,108.665 C38.1@75.358,108.712 ; IC4.8@86.761,106.172 86.761,108.665 C36.1@86.808,108.712 ; IC5.8@98.191,106.172 98.191,108.665 C34.1@98.238,108.712 ; IC6.8@109.709,106.101 109.709,108.594 C24.1@109.756,108.641 ; v1@119.888,103.759 v1(119.888,103.886) ; v1@119.888,105.283 v1(119.888,105.41) ; IC2.8@121.139,106.101 121.139,108.594 C53.1@121.186,108.641
  Bottom Layer w0.203: J1.52@102.82,104.932 J1.51@102.82,108.682 102.82,110.127 v1(102.823,110.13) ; J1.54@103.82,104.932 J1.53@103.82,108.682 v1@103.82,110.127 ; J1.56@104.82,104.932 J1.55@104.82,108.682 v1@104.82,110.127 ; v1@105.82,103.154 J1.58@105.82,104.932 J1.57@105.82,108.682 v1@105.82,110.127 ; v1@106.82,103.154 J1.60@106.82,104.932 J1.59@106.82,108.682 v1@106.82,110.127
  Bottom Layer w0.635: v1(108.423,105.376) 108.423,103.921 v1(108.458,103.886) ; v1(119.888,103.886) v1(119.888,105.41)
  other v1: 105.85,103.124 106.85,103.124 98.044,103.505 97.174,106.553 103.823,110.13 104.823,110.13 105.823,110.13 106.823,110.13 83.947,110.617
I2C1_SCL1: IC4.3 J1.17 J1.18 J18.1 | length 35.6
  Top Layer w0.203: IC4.3@93.111,106.172 93.111,103.271 92.471,102.631 92.471,95.715 ccw(c92.674,95.715) 92.529,95.573 92.571,95.531 ccw(c92.786,95.747) 92.624,95.489 v1(94.782,94.139)
  Bottom Layer w0.203: J1.17@85.82,108.682 J1.18@85.82,104.932 85.82,98.203 87.576,96.447 92.553,96.447 94.782,94.218 v1(94.782,94.139) ; J18.1@94.787,93.264 v1@94.787,94.134
I2C1_SCL1_: R18.2 R25.2 U1.24 U2.24 | length 60.4
  Top Layer w0.203: v1(93.726,79.629) R25.2@93.726,89.154 93.776,89.154 93.924,89.006 R25.2@93.924,88.956 ; v1(102.743,71.145) v1(102.743,79.502) ; v1(122.142,79.341) 122.174,79.309 v1(122.174,71.12)
  Bottom Layer w0.203: v1(93.726,79.629) 95.123,81.026 100.292,81.026 101.816,79.502 v1(102.743,79.502) cw(c102.743,79.299) 102.747,79.502 114.891,79.281 ccw(c114.918,80.749) 114.93,79.281 v1(122.142,79.341) 123.071,79.341 R18.2@123.282,79.537 ; v1(102.743,71.145) 102.85,71.145 102.927,71.222 U1.24@104.267,71.222 ; v1(122.174,71.12) 122.281,71.12 122.358,71.196 U2.24@123.698,71.196
I2C1_SCL1_i: IC4.14 J18.2 R25.1 | length 8.9
  Top Layer w0.203: IC4.14@93.111,96.622 93.334,95.849 93.891,95.491 95.136,94.691 cw(c94.782,94.139) 95.416,93.972 94.845,91.781 cw(c94.648,91.832) v1(94.792,91.689) 94.791,91.688 ccw(c94.935,91.545) 94.763,91.652 93.924,90.302 R25.1@93.726,90.154
  Bottom Layer w0.203: J18.2@94.787,92.564 94.787,91.694 v1(94.792,91.689)
I2C1_SCL2: IC5.4 J1.21 J1.22 J17.1 | length 37.9
  Top Layer w0.203: IC5.4@103.271,106.172 103.271,101.747 102.641,101.117 102.641,95.705 ccw(c102.844,95.705) 102.66,95.621 v1(103.342,94.139)
  Bottom Layer w0.203: J1.21@87.82,108.682 J1.22@87.82,104.932 87.82,103.411 92.526,98.704 98.777,98.704 v1(103.342,94.139) ; J17.1@103.347,93.264 v1@103.347,94.134
I2C1_SCL2_: R30.2 R42.2 U3.24 | length 61.2
  Top Layer w0.203: R30.2@103.251,89.154 103.251,88.011 103.251,81.013 103.567,80.698 v1(103.567,80.645) ; v1(127.635,79.375) v1(127.635,80.92) ; v1(142.875,71.145) v1(142.875,79.502)
  Bottom Layer w0.203: v1(103.567,80.645) 114.886,80.094 ccw(c114.918,80.749) 114.999,80.099 121.331,80.889 cw(c121.412,80.239) 121.409,80.894 v1(127.635,80.92) 142.113,80.92 cw(c142.113,80.264) 142.763,80.35 v1(142.875,79.502) ; R42.2@126.731,79.375 v1(127.635,79.375) ; v1@143.059,71.222 U3.24@144.399,71.222
I2C1_SCL2_i: IC5.13 J17.2 R30.1 | length 7.6
  Top Layer w0.203: R30.1@103.251,90.154 103.352,90.302 v1(103.352,91.689) cw(c103.555,91.689) 103.359,91.743 103.974,93.964 ccw(c103.342,94.139) 103.956,94.368 103.533,95.502 cw(c104.104,95.715) 103.494,95.715 103.494,95.849 IC5.13@103.271,96.622
  Bottom Layer w0.203: J17.2@103.347,92.564 103.347,91.694 v1(103.352,91.689)
I2C1_SDA: IC5.5 J1.19 J1.20 J19.1 | length 37.1
  Top Layer w0.203: v1(101.843,94.139) 101.38,95.646 cw(c101.574,95.705) 101.371,95.705 101.371,101.879 102.001,102.509 IC5.5@102.001,106.172
  Bottom Layer w0.203: J1.19@86.82,108.682 J1.20@86.82,104.932 86.82,103.836 93.025,97.631 98.351,97.631 v1(101.843,94.139) ; J19.1@101.848,93.264 v1@101.848,94.134